# Altium PCB DP_Slave_PCB.PcbDoc
Units mm, origin at the board's own origin, x right, y up, seen from the top; angles counter-clockwise.
Board outline 96.72 x 85.42 mm, 2 copper layers (Top Layer, Bottom Layer); 86 components, 69 nets, 372 pads, 72 vias.
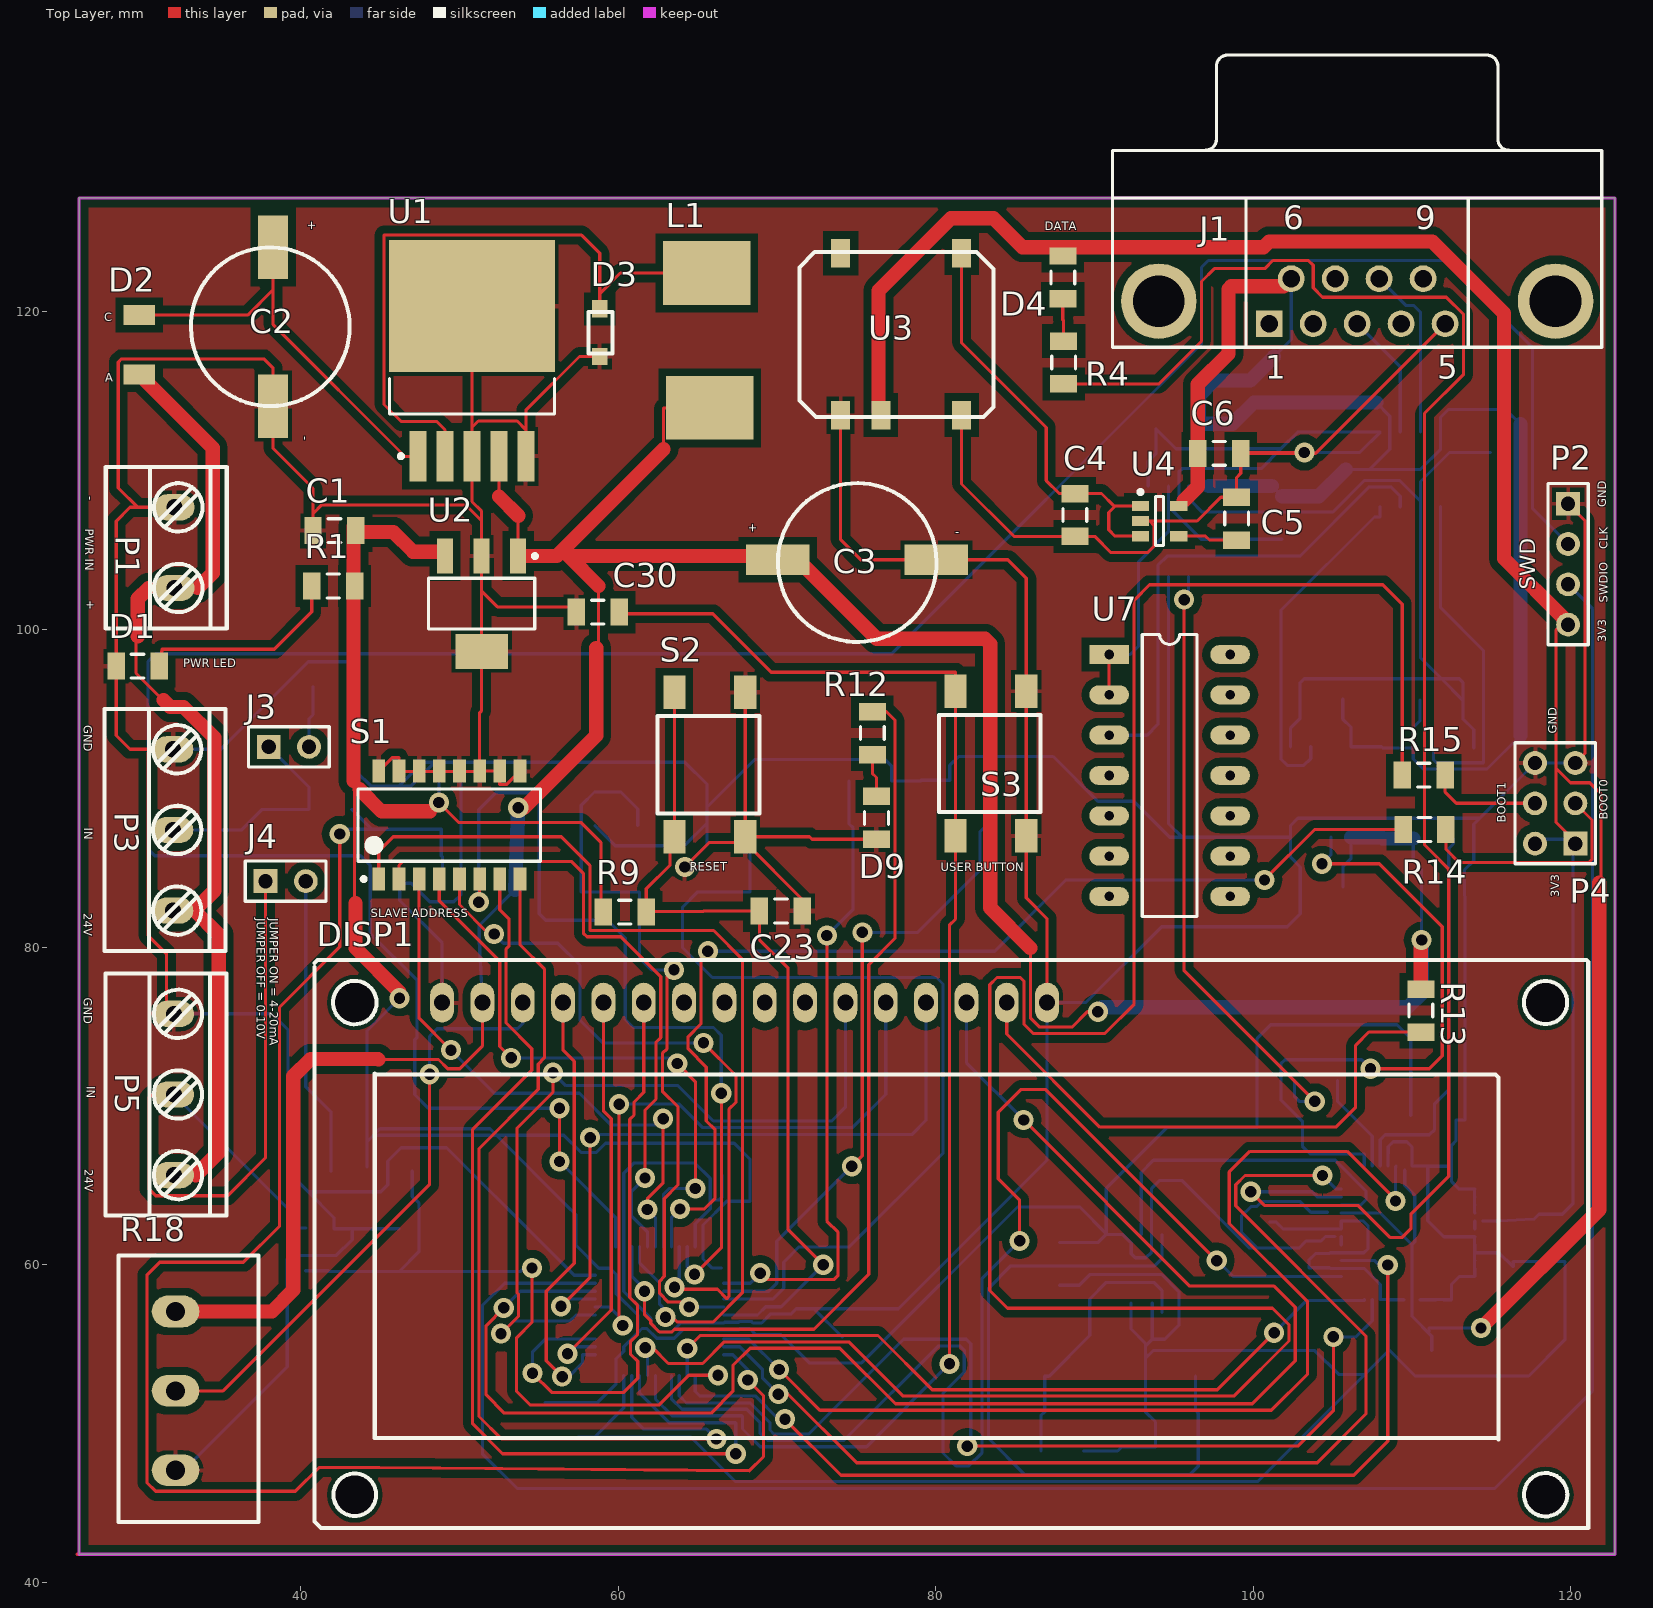
[diagram p0: Top Layer view]
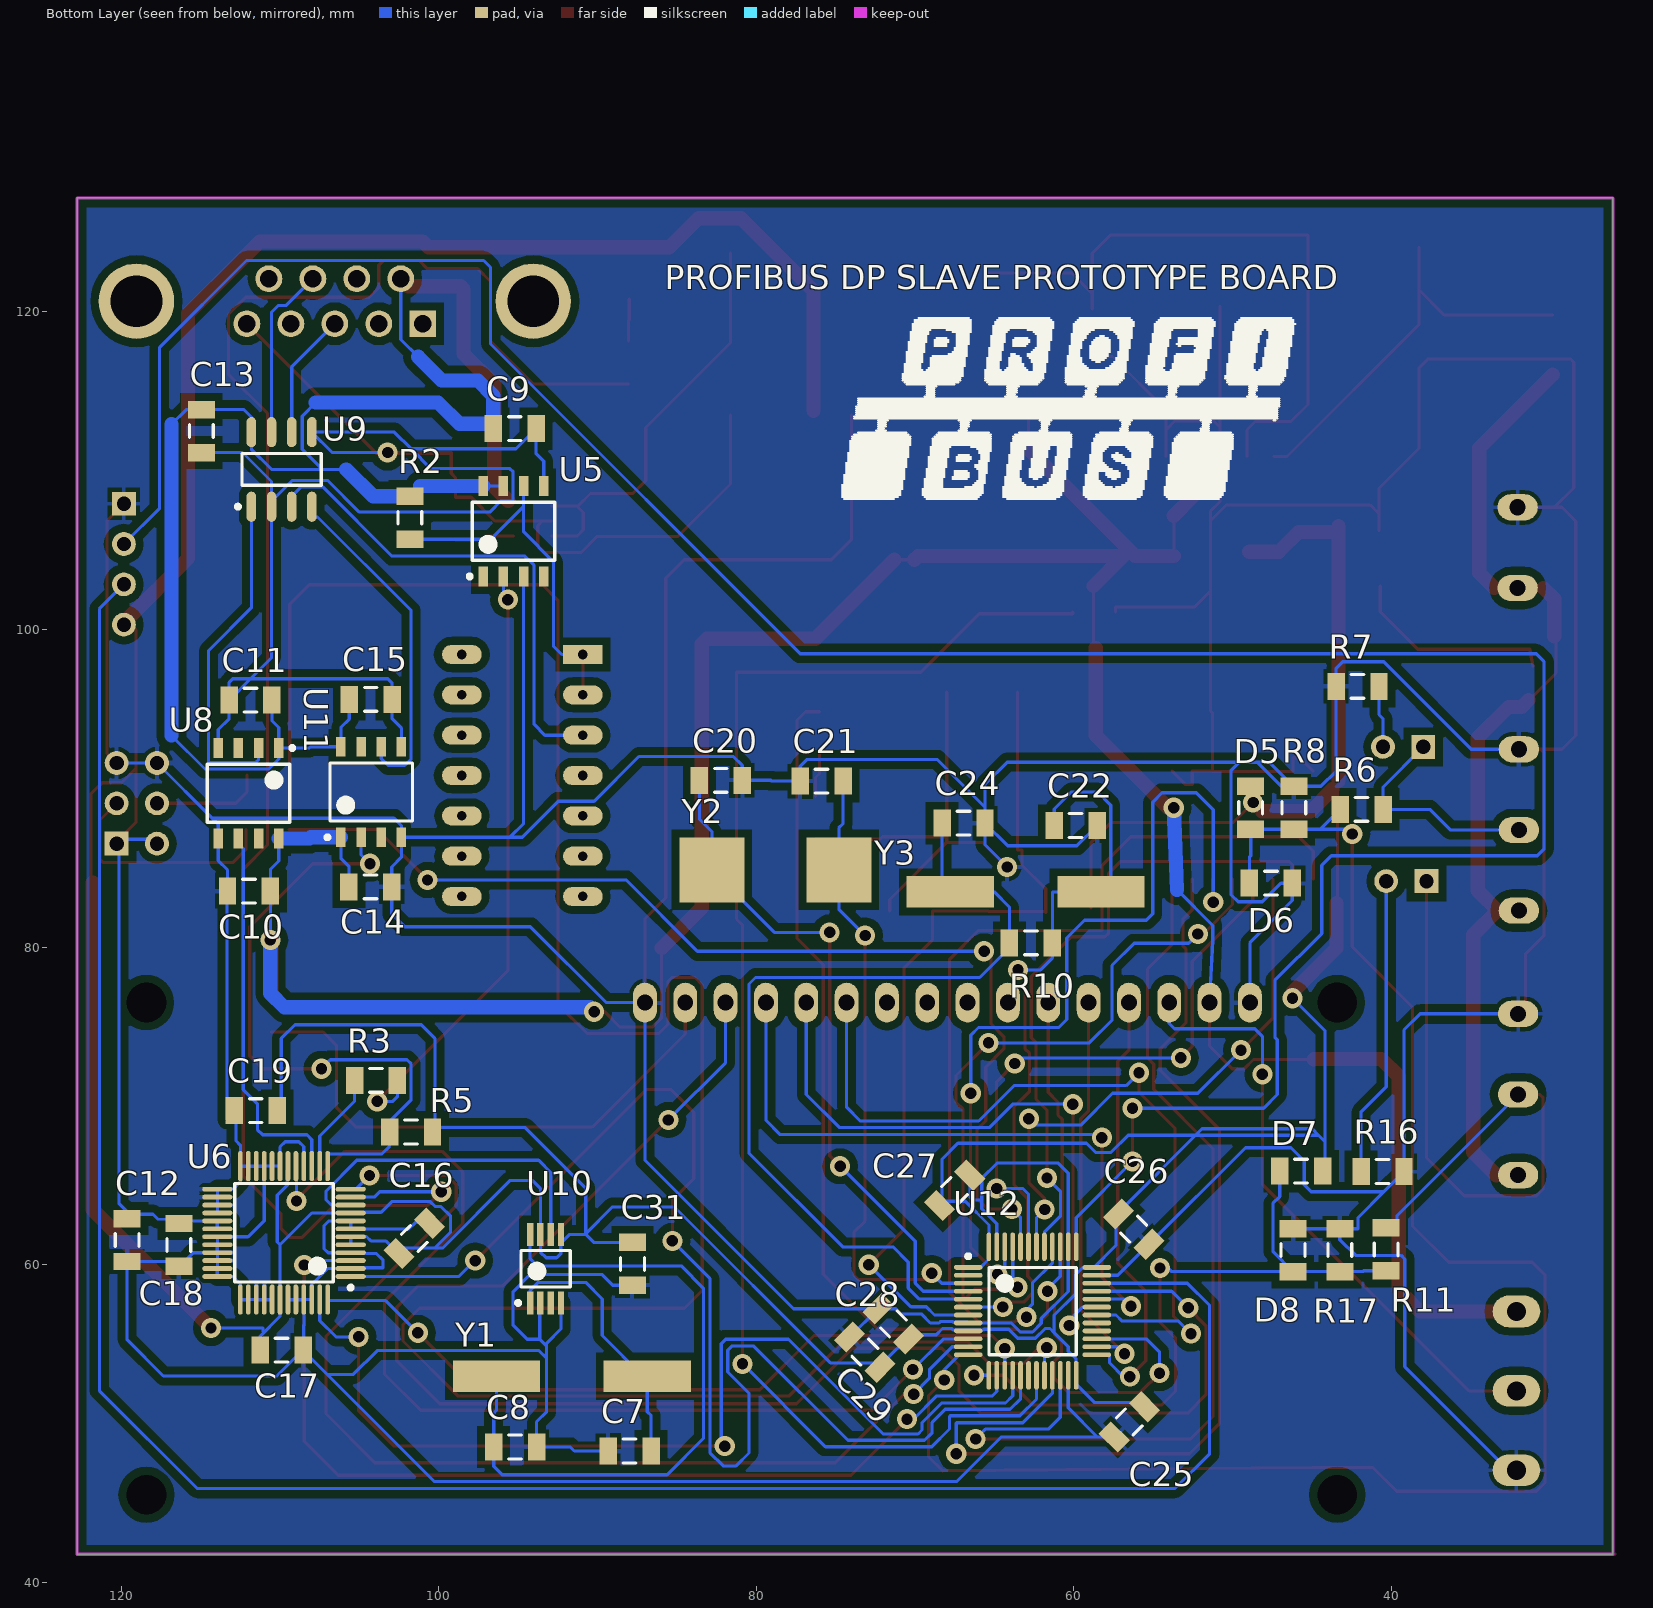
[diagram p1: Bottom Layer view, seen from below]

## Layer stack, top to bottom
Top Solder: solder mask 0.0102, Solder Resist, Dk 3.5
Top Layer: signal copper 0.0356
Dielectric1: dielectric 0.32, FR-4, Dk 4.8
Bottom Layer: signal copper 0.0356
Bottom Solder: solder mask 0.0102, Solder Resist, Dk 3.5

## Board outline
26.06,41.758 26.06,127.178 122.784,127.178 122.784,41.758

## Design rules (kind name [scope] priority, off if disabled: settings)
Clearance Clearance_poly_all [InPoly] p1: gap=0.5
Clearance Clearance_poly_poly [inPoly vs InPoly] p2: gap=0.9
Clearance [All] p3: gap=0.2
Clearance Clearance_1 [InComponent('U6')and IsPad] p4: gap=0.2
PolygonConnect [All] p1: connectstyle=Relief reliefconductorwidth=0.254 reliefentries=4 polygonreliefangle="90 Angle" airgapwidth=0.254
RoutingVias [All] p1: holewidth=0.711 width=1.27 viastyle="Through Hole" minholewidth=0.711 minwidth=1.27 maxholewidth=0.711 maxwidth=1.27
SolderMaskExpansion [All] p1: expansion=0.102
Width [IsTrack and (InNet('24V')or InNet('3V3') or InNet('5V')  or InNet('GND_ISO') or InNet('VCC_ISO'))] p1: maxlimit=1 minlimit=0.2 preferedwidth=1
Width Width_1 [All] p2: maxlimit=0.254 minlimit=0.2 preferedwidth=0.2
30 further rules are at their usual default settings.

## Components (designator, comment, footprint, x,y, rotation, side; value= is the part's Value field where it differs from the comment)
C1 "1uF" C1206 42.139,106.223 r0 top
C2 "100uF/35V" "SMD Elkó" 38.278,119.075 r270 top
C3 "330uF" "SMD Elkó" 75.057,104.394 r0 top
C4 "1uF" C1206 88.773,107.213 r90 top
C5 "10nF" C1206 98.958,106.985 r270 top
C6 "1uF" C1206 97.866,111.1 r180 top
C7 "22pF" C1206 87.986,48.26 r0 bottom
C8 "22pF" C1206 95.199,48.514 r180 bottom
C9 "100nF" C1206 95.225,112.649 r0 bottom
C10 "100nF" C1206 111.963,83.515 r0 bottom
C11 "100nF" C1206 111.862,95.555 r0 bottom
C12 "100nF" C1206 119.634,61.544 r90 bottom
C13 "100nF" C1206 114.96,112.497 r90 bottom
C14 "100nF" C1206 104.318,83.795 r0 bottom
C15 "100nF" C1206 104.292,95.606 r0 bottom
C16 "100nF" C1206 101.549,61.646 r315 bottom
C17 "100nF" C1206 109.906,54.61 r0 bottom
C18 "100nF" C1206 116.383,61.239 r90 bottom
C19 "100nF" C1206 111.531,69.698 r180 bottom
C20 "20pF" C1206 82.245,90.5 r0 bottom
C21 "20pF" C1206 75.895,90.449 r180 bottom
C22 "20pF" C1206 59.893,87.655 r0 bottom
C23 "100nF" C1206 70.256,82.271 r180 top
C24 "20pF" C1206 66.954,87.808 r0 bottom
C25 "100nF" C1206 56.515,50.089 r135 bottom
C26 "100nF" C1206 56.236,62.23 r45 bottom
C27 "100nF" C1206 67.513,64.668 r315 bottom
C28 "100nF" C1206 73.177,54.483 r225 bottom
C29 "1uF" C1206 71.374,56.261 r225 bottom
C30 "100nF" C1206 58.725,101.092 r0 top
C31 "100nF" C1206 87.808,60.046 r90 bottom
D1 "LED0" C1206 29.743,97.688 r180 top
D2 "Diode" "Dióda MiniMelf SOD80" 29.845,116.053 r90 top
D3 "D Schottky" "Schottky dióda" 58.852,118.694 r90 top
D4 "LED0" C1206 88.011,122.174 r270 top
D5 "Diode" C1206 48.87,88.773 r90 bottom
D6 "Diode" C1206 47.6,84.023 r0 bottom
D7 "Diode" C1206 45.695,65.888 r180 bottom
D8 "Diode" C1206 46.203,60.909 r270 bottom
D9 "LED" c1206 76.276,88.138 r270 top
DISP1 "LCD_1602A" LCD 48.92,76.505 r0 top
J1 "D Connector 9" DSUB1.385-2H9 106.553,130.175 r0 top
J3 "JUMP-2" HDR1X2 37.998,92.608 r0 top
J4 "JUMP-2" HDR1X2 37.795,84.15 r0 top
L1 "330mH" "SMD tekercs" 65.583,122.453 r0 top
P1 "Sorkapocs" SORKAPOCS-2 32.055,107.696 r0 top
P2 "Header 4" HDR1X4 119.837,107.925 r270 top
P3 "Header 3" SORKAPOCS-3 31.979,92.456 r0 top
P4 "Header 3X2" HDR2X3 120.294,86.512 r90 top
P5 "Header 3" SORKAPOCS-3 32.029,75.794 r0 top
R1 "330R" C1206 42.062,102.743 r180 top
R2 "" C1206 101.829,107.036 r90 bottom
R3 "1K" C1206 103.962,71.603 r180 bottom
R4 "330R" C1206 88.062,116.815 r90 top
R5 "4K7" C1206 101.752,68.351 r180 bottom
R6 "41.2k, 0.1%" C1206 41.885,88.671 r0 bottom
R7 "500R, 0.1%" C1206 42.139,96.418 r0 bottom
R8 "20k, 0.1%" C1206 46.152,88.773 r270 bottom
R9 "10k" C1206 60.427,82.194 r0 top
R10 "1M" c1206 62.713,80.264 r180 bottom
R11 "41.2k, 0.1%" C1206 40.335,60.96 r270 bottom
R12 "330R" c1206 76.022,93.472 r90 top
R13 "330R" C1206 110.566,75.997 r270 top
R14 "100K" C1206 110.795,87.401 r0 top
R15 "100K" C1206 110.744,90.83 r180 top
R16 "500R, 0.1%" C1206 40.564,65.862 r180 bottom
R17 "20k, 0.1%" C1206 43.256,60.909 r270 bottom
R18 "10k" Potméter 32.131,57.048 r270 top
S1 "SW DIP-8" "DIP switch" 49.378,87.681 r90 top
S2 "Nyomógomb" Switch 63.551,86.944 r90 top
S3 "Nyomógomb" Switch 81.255,87.02 r90 top
U1 "LM2575S-5.0" TS5B_N 50.8,116.916 r90 top
U2 "MCP1825S-3302E/DB" SOT-223-DB3_N 51.41,101.625 r270 top
U3 "R1SE-3.305/H2-R" "Isolated DC/DC converter" 74.016,123.698 r0 top
U4 "LP3985IM5-5.0/NOPB" MF05A_N 94.107,106.832 r0 top
U5 "HCPL-061N" HCPL-061N 83.871,123.292 r90 bottom
U6 "VPC3+S-QFP48" TSQFP50P900X900X160-48N 109.753,62.001 r0 bottom
U7 "NAND2" "NAND gate DIP14" 90.932,98.425 r0 top
U8 "HCPL-072X" SOIC127P600X330-8N 111.989,89.687 r270 bottom
U9 "SN75176BD" D008_L 109.906,110.084 r90 bottom
U10 "MAX31180" "MAX31180AUA+ -  Clock Generator" 71.831,107.036 r90 bottom
U11 "HCPL-072X" SOIC127P600X330-8N 104.267,89.764 r90 bottom
U12 "STM32F103C8T6" LQFP48_N 62.611,57.074 r180 bottom
Y1 "24MHz" "8 MHz SMD kristály" 103.124,50.47 r180 bottom
Y2 "XTAL" "32.768 MHz SMD kristály" 74.803,84.861 r0 bottom
Y3 "XTAL" "8 MHz SMD kristály" 74.549,80.975 r180 bottom

## Footprints (in the part's own frame and the unit in brackets; to place one, negate y for a bottom-side part, rotate by r counter-clockwise, add the part's x,y. Pads: shape width x height; smd on the part's side, far side on the other; paste and mask are expansions set on the pad)
"8 MHz SMD kristály" [mm]
  rect 5.5x2 smd: 1(6.75,2.5) 2(16.25,2.5)
"32.768 MHz SMD kristály" [mm]
  rect 4.1x4.1 smd: 1(0,0) 2(8,0)
C1206 [mm] "Chip Capacitor, Body 3.2x1.6mm, IPC High Density"
  rect 1.1x1.7 smd: 1(-1.35,0) 2(1.35,0)
  silkscreen extent -0.4,-0.75 0.4,0.75, body extent -1.7,-0.9 1.7,0.9, height 1.3
c1206 [mm] "Chip Capacitor, Body 3.2x1.6mm, IPC High Density"
  rect 1.1x1.7 smd: 1(-1.35,0) 2(1.35,0)
  silkscreen extent -0.4,-0.75 0.4,0.75, body extent -1.7,-0.9 1.7,0.9, height 1.3
D008_L [mm] "SOIC, 8-Leads, Body 4.9x3.9mm, Pitch 1.27mm, IPC High Density"
  oval 1.9x0.6 smd: 1(-2.35,1.905) 2(-2.35,0.635) 3(-2.35,-0.635) 4(-2.35,-1.905) 5(2.35,-1.905) 6(2.35,-0.635) 7(2.35,0.635) 8(2.35,1.905)
  silkscreen extent -2.47,-2.5 1,2.88, body extent -2,-2.5 2,2.5, height 1.75
"DIP switch" [mm] "TSOP, 16-Leads, Body 12,50x4,50mm, Pitch 1,27mm, IPC Medium Density"
  rect 1.45x0.8 smd: 1(-3.4,4.445) 2(-3.4,3.175) 3(-3.4,1.905) 4(-3.4,0.635) 5(-3.4,-0.635) 6(-3.4,-1.905) 7(-3.4,-3.175) 8(-3.4,-4.445) 9(3.4,-4.445) 10(3.4,-3.175) 11(3.4,-1.905) 12(3.4,-0.635) 13(3.4,0.635) 14(3.4,1.905) 15(3.4,3.175) 16(3.4,4.445)
  silkscreen extent -3.52,-5.75 2.27,5.75, body extent -3.69,-6.25 3.7,6.25, height 1.5
"Dióda MiniMelf SOD80" [mm]
  rect 1.25x2 smd: 1(0,0) 2(3.75,0)
DSUB1.385-2H9 [mm] "Connector; D Subminiature; 9 Position; Right Angle; Pitch 1.385 mm"
  rect 1.69x1.69 hole 1.09: 1(-5.54,-10.92)
  round 1.69 hole 1.09: 2(-2.77,-10.92) 3(0,-10.92) 4(2.77,-10.92) 5(5.54,-10.92) 6(-4.155,-8.08) 7(-1.385,-8.08) 8(1.385,-8.08) 9(4.155,-8.08)
  round 4.76 hole 3.26: 10(-12.495,-9.5) 11(12.495,-9.5)
  silkscreen extent -15.4,-12.4 15.4,6
HCPL-061N [mm] "SOP, 8-Leads, Body 5,08x3,94mm, Pitch 1,27mm, IPC Medium Density"
  rect 1.25x0.6 smd: 1(-19.95,13.335) 2(-19.95,12.065) 3(-19.95,10.795) 4(-19.95,9.525) 5(-14.25,9.525) 6(-14.25,10.795) 7(-14.25,12.065) 8(-14.25,13.335)
  silkscreen extent -20.07,8.83 -15.28,14.31, body extent -20.1,8.83 -14.1,14.03, height 3.3
HDR1X2 [mm]
  rect 1.5x1.5 hole 0.9: 1(0,0)
  round 1.5 hole 0.9: 2(2.54,0)
  silkscreen extent -1.27,-1.27 3.81,1.27
HDR1X4 [mm] "Connector; Header; 4 Position"
  rect 1.5x1.5 hole 0.9: 1(0,0)
  round 1.5 hole 0.9: 2(2.54,0) 3(5.08,0) 4(7.62,0)
  silkscreen extent -1.27,-1.27 8.89,1.27
HDR2X3 [mm] "Connector; Header; 3x2 Position"
  rect 1.5x1.5 hole 0.9: 1(0,0)
  round 1.5 hole 0.9: 2(0,2.54) 3(2.54,0) 4(2.54,2.54) 5(5.08,0) 6(5.08,2.54)
  silkscreen extent -1.27,-1.27 6.35,3.81
"Isolated DC/DC converter" [mm] "R1SE-3.305/H2-R"
  rect 1.2x1.8 smd: 1(0,-10.2) 2(2.54,-10.2) 4(7.62,-10.2) 5(7.62,0) 8(0,0)
  silkscreen extent -2.59,-10.31 9.63,0.08
LCD [mm]
  oval 1.5x2.5 hole 1: 1(0,0) 2(2.54,0) 3(5.08,0) 4(7.62,0) 5(10.16,0) 6(12.7,0) 7(15.24,0) 8(17.78,0) 9(20.32,0) 10(22.86,0) 11(25.4,0) 12(27.94,0) 13(30.48,0) 14(33.02,0) 15(35.56,0) 16(38.1,0)
  round 0 hole 2.5: 19(-5.5,-31) 19(-5.5,0) 19(69.5,-31) 19(69.5,0)
  silkscreen extent -8.03,-33.1 72.19,2.67
LQFP48_N [mm] "Thin QFP, 48-Leads, Body 7x7mm, Pitch 0.5mm, IPC Medium Density"
  oval 1.8x0.3 smd: 1(-4.05,2.75) 2(-4.05,2.25) 3(-4.05,1.75) 4(-4.05,1.25) 5(-4.05,0.75) 6(-4.05,0.25) 7(-4.05,-0.25) 8(-4.05,-0.75) 9(-4.05,-1.25) 10(-4.05,-1.75) 11(-4.05,-2.25) 12(-4.05,-2.75) 25(4.05,-2.75) 26(4.05,-2.25) 27(4.05,-1.75) 28(4.05,-1.25) 29(4.05,-0.75) 30(4.05,-0.25) 31(4.05,0.25) 32(4.05,0.75) 33(4.05,1.25) 34(4.05,1.75) 35(4.05,2.25) 36(4.05,2.75)
  oval 0.3x1.8 smd: 13(-2.75,-4.05) 14(-2.25,-4.05) 15(-1.75,-4.05) 16(-1.25,-4.05) 17(-0.75,-4.05) 18(-0.25,-4.05) 19(0.25,-4.05) 20(0.75,-4.05) 21(1.25,-4.05) 22(1.75,-4.05) 23(2.25,-4.05) 24(2.75,-4.05) 37(2.75,4.05) 38(2.25,4.05) 39(1.75,4.05) 40(1.25,4.05) 41(0.75,4.05) 42(0.25,4.05) 43(-0.25,4.05) 44(-0.75,4.05) 45(-1.25,4.05) 46(-1.75,4.05) 47(-2.25,4.05) 48(-2.75,4.05)
  silkscreen extent -4.18,-2.75 2.75,3.57, body extent -3.5,-3.5 3.5,3.5, height 1.6
"MAX31180AUA+ -  Clock Generator" [mm] "uSOP"
  rect 1.45x0.4 smd: 1(-49.45,22.425) 2(-49.45,21.775) 3(-49.45,21.125) 4(-49.45,20.475) 5(-45.15,20.475) 6(-45.15,21.125) 7(-45.15,21.775) 8(-45.15,22.425)
  silkscreen extent -49.57,19.9 -46.15,23.3, body extent -49.75,19.9 -44.85,23, height 1.1
MF05A_N [mm] "SOT23, 5-Leads, Body 2.9x1.6mm, Pitch 0.95mm, Lead Span 2.8mm, IPC Medium Density"
  rect 1.1x0.65 smd: 1(-1.2,0.95) 2(-1.2,0) 3(-1.2,-0.95) 4(1.2,-0.95) 5(1.2,0.95)
  silkscreen extent -1.32,-1.55 0.25,1.95, body extent -0.9,-1.55 0.9,1.55, height 1.19
"NAND gate DIP14" [mm]
  rect 2.5x1.2 hole 0.6: 1(0,0)
  oval 2.5x1.2 hole 0.6: 2(0,-2.54) 3(0,-5.08) 4(0,-7.62) 5(0,-10.16) 6(0,-12.7) 7(0,-15.24) 8(7.62,-15.24) 9(7.62,-12.7) 10(7.62,-10.16) 11(7.62,-7.62) 12(7.62,-5.08) 13(7.62,-2.54) 14(7.62,0)
  silkscreen extent 2.08,-16.51 5.54,1.27
Potméter [mm]
  oval 2x3 hole 1.2: 1(0,0) 2(10,0) 3(5,0)
  silkscreen extent -3.53,-3.61 13.26,5.23
"Schottky dióda" [mm] "1N5819HW"
  rect 1.1x1 smd: 1(-1.5,0) 2(1.5,0)
  silkscreen extent -1.3,-0.8 1.3,0.7
"SMD Elkó" [mm]
  rect 4x1.9 smd: 1(-5,0) 2(5,0)
  silkscreen extent -4.99,-5.18 5.01,4.82
"SMD tekercs" [mm] "MSS1278T-334KLD"
  rect 5.5x4 smd: 1(0,0) 2(0.2,-8.5)
SOIC127P600X330-8N [mm] "SOIC, 8-Leads, Body 5,08x3,94mm, Pitch 1,27mm, IPC Medium Density"
  rect 1.25x0.6 smd: 1(-2.85,1.905) 2(-2.85,0.635) 3(-2.85,-0.635) 4(-2.85,-1.905) 5(2.85,-1.905) 6(2.85,-0.635) 7(2.85,0.635) 8(2.85,1.905)
  silkscreen extent -2.97,-2.6 1.82,2.88, body extent -3,-2.6 3,2.6, height 3.3
SORKAPOCS-2 [mil]
  oval 100x65 hole 40: 1(0,0) 2(0,-200)
  silkscreen extent -170,-300 130,100
SORKAPOCS-3 [mil]
  oval 100x65 hole 40: 1(0,0) 2(0,-200) 3(0,-400)
  silkscreen extent -170,-500 130,100
SOT-223-DB3_N [mm] "SOT223, 4-Leads, Body 6.5x3.5mm, Pitch 2.3mm, Lead Span 7mm, IPC Medium Density"
  rect 2.2x1 smd: 1(-3,2.3) 2(-3,0) 3(-3,-2.3)
  rect 2.2x3.3 smd: 4(3,0)
  silkscreen extent -3.12,-3.35 1.6,3.48, body extent -1.85,-3.35 1.85,3.35, height 1.8
Switch [mm] "FSM2JSMLS -  Tactile Switch"
  rect 2.1x1.4 smd: 1(9.1,-4.46) 2(0,-4.46) 3(9.1,0) 4(0,0)
  silkscreen extent 1.47,-5.35 7.6,1.05
TS5B_N [mm] "D2-PAK, 6-Leads, Body 8.6x10.2mm, Pitch 1.7mm, Lead Span 14.1mm, IPC Medium Density"
  rect 3.2x1.05 smd: 1(-6,3.4) 2(-6,1.7) 3(-6,0) 4(-6,-1.7) 5(-6,-3.4)
  rect 8.3x10.45 smd: 6(3.45,0)
  silkscreen extent -6.12,-5.2 -1.1,5.2, body extent -3.35,-5.2 6.05,5.2, height 4.65
TSQFP50P900X900X160-48N [mm] "TSQFP, 48-Leads, Body 7,00x7,00mm, Pitch 0,50mm, IPC Medium Density"
  oval 1.9x0.3 smd: 1(-4.2,2.75) 2(-4.2,2.25) 3(-4.2,1.75) 4(-4.2,1.25) 5(-4.2,0.75) 6(-4.2,0.25) 7(-4.2,-0.25) 8(-4.2,-0.75) 9(-4.2,-1.25) 10(-4.2,-1.75) 11(-4.2,-2.25) 12(-4.2,-2.75) 25(4.2,-2.75) 26(4.2,-2.25) 27(4.2,-1.75) 28(4.2,-1.25) 29(4.2,-0.75) 30(4.2,-0.25) 31(4.2,0.25) 32(4.2,0.75) 33(4.2,1.25) 34(4.2,1.75) 35(4.2,2.25) 36(4.2,2.75)
  oval 0.3x1.9 smd: 13(-2.75,-4.2) 14(-2.25,-4.2) 15(-1.75,-4.2) 16(-1.25,-4.2) 17(-0.75,-4.2) 18(-0.25,-4.2) 19(0.25,-4.2) 20(0.75,-4.2) 21(1.25,-4.2) 22(1.75,-4.2) 23(2.25,-4.2) 24(2.75,-4.2) 37(2.75,4.2) 38(2.25,4.2) 39(1.75,4.2) 40(1.25,4.2) 41(0.75,4.2) 42(0.25,4.2) 43(-0.25,4.2) 44(-0.75,4.2) 45(-1.25,4.2) 46(-1.75,4.2) 47(-2.25,4.2) 48(-2.75,4.2)
  silkscreen extent -4.32,-3.1 3.1,3.57, body extent -4.5,-4.5 4.5,4.5, height 1.6

## Part data
C1 C12 C23: library part "Cap Semi", "Szûrõkondi"
C2: library part "Cap Pol3", "SMD elkó/40V"
C3: library part "Cap Pol3", "LDO kimeneti polárkondi"
C4 C5 C6 C16 C17 C18 C19 C31: library part "Cap Semi", "Capacitor (Semiconductor SIM Model)"
C7 C8 C20 C21 C22 C24 C25 C26 C27 C28 C29 C30: library part "Cap Semi", "SMD kerámia"
C9 C10 C11 C13 C14 C15: library part "Cap Semi", "SMD KERÁMIA"
D1 D4: "Typical INFRARED GaAs LED"
D3: "Schottky Diode"
D5 D6 D7 D8: "Default Diode"
D9: library part LED2, "Piros felhasználói LED"
J1: "Receptacle Assembly, 9 Position, Right Angle"
L1: library part Inductor, "Inductor"
P1: library part "Header 2", "12V input"
P2: "Header, 4-Pin"
P3 P5: "Header, 3-Pin"
P4: "Header, 3-Pin, Dual row"
R1 R4 R5 R6 R7 R8 R9 R10 R11 R12 R13 R14 R15 R16 R17: library part Res3, "SMD ellenállás"
R2: library part Res3, "Resistor"
R3: library part Res3, "SMD ELLENÁLLÁS"
R18: library part RPot, "Potentiometer"
S1: "DIP Switch, 8 Position, SPST"
S2 S3: library part "Tactile switch", "4 lábas, SMD, tactile"
U1: "SIMPLE SWITCHER® 1A Step-Down Voltage Regulator, 5-pin TO-263"
U2: "500 mA, Low Voltage, Low Quiescent Current LDO Regulator, 3-Pin SOT-223, Extended Temperature"
U3: "Isolated DC/DC converter 3.3-5V"
U4: "Micropower, 150mA Low-Noise Ultra Low-Dropout CMOS Voltage Regulator, 5-pin SOT-23, Pb-Free"
U6: library part VPC3+S(1), "pROFIBUS CONTROLLER"
U7: "2-Input NAND"
U8 U11: "Optocoupler"
U9: "Differential Bus Transceiver"
U12: "STM32 ARM-based 32-bit MCU with 64 Kbytes Flash, 48-pin LQFP, Industrial Temperature"
Y1: library part XTAL, "SMD kristály"
Y2: "32.768 KHz kristály"
Y3: "8 MHz kristály"

## Via types
v1: diameter 1.27, hole 0.711, Top Layer to Bottom Layer, 72 vias

## Nets (pads, with @x,y where several pads share a name; then routed paths per layer and width w, separated by ;. In a path a pad name is that pad's centre, name@x,y a point inside that pad or via, vN(x,y) a via of type N, cw(c..) or ccw(c..) an arc to the next point about the centre after c; other vN are vias at no path point)
1: S1.1 U12.40 | length 63
  Top Layer w0.2: S1.1 44.933,86.03 45.847,86.944 56.423,86.944 58.227,85.141 58.227,81.044 66.019,81.044 67.832,79.231 67.832,58.231 65.989,56.388 63.729,56.388 63.017,57.099 62.992,57.074 v1(62.992,56.693)
  Bottom Layer w0.2: U12.40 61.361,60.096 62.616,58.841 62.616,57.501 62.992,57.125 v1(62.992,56.693)
2: S1.2 U12.41 | length 40.8
  Top Layer w0.2: S1.2 46.203,85.141 46.457,85.395 57.063,85.395 57.817,84.641 57.817,80.874 58.047,80.644 60.173,80.644 62.687,78.13 62.687,74.298 62.394,74.004 62.394,70.42 61.697,69.723 v1(61.697,65.456)
  Bottom Layer w0.2: v1(61.697,65.456) 60.858,64.618 60.858,63.043 61.861,62.04 U12.41
3: S1.3 U12.42 | length 35.8
  Top Layer w0.2: S1.3 47.473,75.514 v1(49.479,73.508) ; v1(61.849,63.475) 61.849,64.152 62.84,65.143 v1(62.84,69.19)
  Bottom Layer w0.2: v1(49.479,73.508) 52.197,70.789 57.573,70.789 59.579,68.783 62.433,68.783 v1(62.84,69.19) ; v1(61.849,63.475) 62.361,62.963 U12.42
3V3: C1.2 C12.2 C16.2 C17.2 C18.2 C19.2 C25.2 C26.2 C27.2 C28.2 C29.2 C31.2 D4.1 D5.2 D7.2 P2.4 P4.1 P4.2 R1.1 R5.2 R9.1 U2.3 U3.2 U6.5 U6.6 U6.9 U6.18 U6.29 U6.30 U6.42 U10.5 U10.7 U12.1 U12.9 U12.24 U12.36 U12.48 | length 424.7
  Top Layer w0.2: C1.2@43.336,106.502 C1.2@43.692,106.147 ; 43.409,90.399 43.409,82.804 43.459,82.753 ; 48.158,88.544 v1(48.717,89.103) 49.982,87.838 57.679,87.838 58.924,86.592 R9.1@58.924,82.474 ; P2.4@119.685,100.584 119.075,99.974 119.075,91.262 ; P4.1@120.142,86.792 119.075,87.859 119.075,91.262 ; 122.123,83.947 121.92,84.15 121.92,89.637 121.209,90.348 119.99,90.348 119.075,91.262
  Top Layer w0.9: 43.336,90.471 C1.2@43.336,106.502 ; 43.459,82.753 43.459,79.934 46.239,77.154 v1(46.239,76.773) ; C1.2@43.692,106.147 45.847,106.147 47.089,104.905 U2.3@48.957,104.905 ; 43.723,89.932 45.11,88.544 48.158,88.544 ; U3.2@76.403,113.777 76.403,121.336 80.975,125.908 83.642,125.908 85.471,124.079 100.657,124.079 101.013,124.435 111.281,124.435 115.799,119.917 115.799,104.47 P2.4@119.685,100.584 ; v1(114.351,56.007) 121.793,63.449 121.793,84.049
  Bottom Layer w0.2: D7.2@44.192,66.167 44.192,67.742 ; v1(46.239,76.773) 44.192,74.726 44.192,67.742 ; v1(48.717,89.103) D5.2@48.717,90.402 ; C25.2@55.408,51.323 58.733,51.323 59.868,52.458 59.868,54.051 60.364,54.548 60.364,54.832 61.265,55.732 ; U12.1@66.509,59.792 65.915,59.792 65.354,60.352 65.354,62.495 66.852,63.993 68.315,63.993 68.315,66.635 67.31,67.64 59.209,67.64 58.629,67.061 57.674,67.061 56.586,68.148 52.344,68.148 ; C31.2 90.25,61.396 90.754,61.9 90.754,61.954 ; 100.269,61.047 99.263,62.052 99.263,63.043 99.878,63.657 100.235,63.657 100.544,63.967 102.975,63.967 103.64,63.301 U6.9@104.667,63.301 ; U6.6@105.143,61.773 104.561,61.773 104.282,61.493 103.353,61.493 102.906,61.047 99.761,61.047 95.504,65.303 94.107,65.303 93.606,64.803 U10.7 93.606,60.789 93.243,60.427 92.583,60.427 92.329,60.681 92.329,61.341 91.784,61.886 90.823,61.886 90.754,61.954 ; U6.5 U6.6 ; U6.9 107.995,63.251 110.003,61.243 ; U6.18@109.525,65.964 109.553,65.935 109.553,64.995 110.185,64.364 110.185,61.425 110.003,61.243 ; C19.2@109.927,69.393 109.927,74.244 109.064,75.108 101.114,75.108 100.25,74.244 100.25,68.631 94.564,68.631 90.754,64.821 90.754,61.954 ; 111.078,55.804 111.078,56.007 v1(114.351,56.007) ; C17.2 111.256,55.499 110.003,56.751 U6.42 110.003,61.243 ; U6.30 U6.29 ; U6.29@114.452,62.742 115.453,62.742 117.704,62.869 118.008,63.174 119.482,63.174 120.142,63.834 120.142,86.792 P4.2@117.602,86.792 ; 44.192,67.742 44.599,68.148 ; 44.599,68.148 45.005,68.555 51.937,68.555 52.344,68.148 ; 44.599,68.148 52.344,68.148 ; 52.344,68.148 57.028,63.464 57.038,63.464 57.353,63.149 57.353,61.214 58.793,59.774 59.497,59.774 59.893,59.378 59.893,58.166 61.265,56.795 61.265,55.732 ; 61.265,55.732 61.509,55.977 61.82,55.977 62.439,55.358 63.545,55.358 64.111,55.924 65.675,55.924 65.725,55.874 67.597,55.874 67.697,55.974 68.279,55.974 68.667,55.586 70.267,55.586 70.267,55.575 72.034,53.808 75.342,53.808 85.161,63.627 89.082,63.627 90.754,61.954
4: S1.4 U12.43 | length 37.6
  Top Layer w0.2: S1.4 48.743,82.906 52.55,79.098 52.55,73.738 v1(53.269,73.02) ; v1(63.729,72.669) 64.872,71.526 v1(64.872,64.795)
  Bottom Layer w0.2: v1(53.269,73.02) 63.378,73.02 v1(63.729,72.669) ; U12.43 62.861,64.436 63.22,64.795 v1(64.872,64.795)
5: S1.5 U12.45 | length 46.4
  Top Layer w0.2: S1.5 50.013,82.677 51.867,80.823 v1(52.197,80.823) ; v1(63.551,58.572) 63.673,58.45 66.264,58.45 66.853,57.861 66.98,57.988 66.98,69.774 67.432,70.226 67.432,71.912 v1(65.38,73.965)
  Bottom Layer w0.2: v1(52.197,80.823) 52.781,80.239 56.21,80.239 57.607,78.842 57.607,75.387 59.03,73.965 v1(65.38,73.965) ; v1(63.551,58.572) 63.779,58.572 63.861,58.491 U12.45
5V: C3.1 C10.1 C14.2 DISP1.2 L1.2 R13.1 R18.1 U1.4 U2.1 U8.8 U11.1 | length 194.1
  Top Layer w0.2: 44.912,72.919 48.697,72.919 49.276,72.339 50.038,72.339 51.46,73.762 DISP1.2 ; 52.5,108.372 U1.4 ; U2.1@53.71,104.623 U2.1 53.71,107.163 ; 56.134,104.623 56.896,104.623 ; 58.623,98.831 58.776,98.984 58.776,102.743 ; 62.865,111.354 62.865,113.953 L1.2 ; C3.1 C3.1@71.323,104.394 ; 85.97,79.942 85.97,75.548 86.563,74.955 88.595,74.955 89.561,75.921 v1(90.221,75.921) ; v1@110.566,80.442 v1(110.613,80.442)
  Top Layer w0.9: R18.1 38.202,57.048 39.548,58.395 39.548,71.857 40.64,72.949 44.882,72.949 44.912,72.919 ; 52.5,108.372 53.71,107.163 ; U2.1@53.71,104.623 56.134,104.623 62.865,111.354 ; v1(53.721,88.773) 54.077,88.773 58.623,93.32 58.623,98.831 ; 58.776,102.743 56.896,104.623 69.828,104.623 C3.1 ; C3.1@71.323,104.394 76.302,99.416 83.109,99.416 83.439,99.085 83.439,82.474 85.97,79.942 ; R13.1 v1@110.566,80.442
  Bottom Layer w0.2: DISP1.2 51.262,80.437 51.262,81.356 53.507,83.601 ; v1(90.221,75.921) v1@90.5,76.2 ; C14.2 105.668,85.09 106.172,85.594 U11.1 ; 108.077,86.914 108.153,86.837 ; U8.8 110.084,85.416 110.613,84.887 C10.1 v1(110.613,80.442)
  Bottom Layer w0.9: 53.507,83.601 v1(53.721,88.773) ; v1@90.5,76.2 109.728,76.2 110.613,77.085 v1(110.613,80.442) ; U11.1 108.077,86.914 ; 108.153,86.837 U8.8
6: S1.6 U12.46 | length 54.2
  Top Layer w0.2: v1(51.232,82.829) 51.283,82.88 S1.6 ; v1(64.821,59.385) 66.523,61.087 66.523,70.764 v1(66.497,70.79)
  Bottom Layer w0.2: v1(51.232,82.829) 51.232,88.646 52.299,89.713 54.458,89.713 55.042,89.129 55.042,82.093 55.448,81.686 59.334,81.686 60.452,80.569 60.452,75.438 60.96,74.93 66.015,74.93 66.497,74.447 v1(66.497,70.79) ; U12.46 64.361,59.845 v1(64.821,59.385)
7: S1.7 U12.21 | length 64.1
  Top Layer w0.2: S1.7 52.553,82.342 53.138,81.757 53.138,80.074 52.95,79.887 52.95,75.213 54.57,73.593 54.57,72.241 50.843,68.513 50.843,49.97 52.726,48.087 v1(67.412,48.087)
  Bottom Layer w0.2: U12.21 61.361,51.9 63.223,50.038 67.386,50.038 67.412,50.012 v1(67.412,48.087)
8: S1.8 U12.22 | length 60.3
  Top Layer w0.2: S1.8 53.823,80.162 55.361,78.624 55.361,73.02 54.97,72.63 54.97,71.034 51.243,67.307 51.243,50.433 52.654,49.022 v1(66.192,49.022)
  Bottom Layer w0.2: U12.22 60.861,50.391 61.614,49.638 65.576,49.638 v1(66.192,49.022)
24V: D2.1 P1.2 P3.3 P5.3 | length 63.2
  Top Layer w0.2: 29.743,99.568 29.642,99.466 29.642,97.257 31.344,95.555 31.369,95.555 ; 30.429,102.616 P1.2 33.528,102.616 ; P3.3 33.325,82.296 ; P5.3 33.401,65.634
  Top Layer w0.9: 29.743,99.568 29.743,101.93 30.429,102.616 ; D2.1 34.468,111.43 34.468,103.556 33.528,102.616 ; 31.369,95.555 31.801,95.123 32.639,95.123 34.569,93.193 34.569,83.541 33.325,82.296 34.849,80.772 34.849,67.081 33.401,65.634
A: J1.3 U9.6 | length 7.9
  Bottom Layer w0.2: J1.3 109.271,116.537 U9.6
ADC1: D5.1 D6.2 R6.2 R8.2 U12.12 | length 108.5
  Top Layer w0.2: v1(42.469,87.122) 42.469,80.01 38.684,76.225 38.684,62.433 36.398,60.147 31.14,60.147 30.328,59.334 30.328,46.279 30.886,45.72 39.675,45.72 41.173,47.219 44.958,47.219 68.275,47.015 69.164,47.904 69.164,51.74 v1(68.174,52.73)
  Bottom Layer w0.2: v1(42.469,87.122) 42.77,87.423 44.483,87.423 ; R6.2 44.483,87.423 ; D6.2 48.95,85.674 48.87,85.754 D5.1 R8.2 44.483,87.423 ; U12.12 67.234,54.324 68.174,53.384 v1(68.174,52.73)
ADC2: D7.1 D8.2 R11.2 R17.2 U12.13 | length 44.3
  Top Layer w0.2: v1(54.582,59.792) 54.582,56.36 53.613,55.391 53.613,52.007 54.458,51.162 62.593,51.162 64.466,53.035 v1(66.294,53.035)
  Bottom Layer w0.2: R11.2 41.758,59.61 41.808,59.559 R17.2 D8.2 ; D7.1 47.045,64.284 47.473,63.856 47.473,60.829 D8.2 ; v1(54.582,59.792) 54.08,59.792 53.848,59.559 D8.2 ; U12.13 65.361,53.035 v1(66.294,53.035)
B: J1.8 U9.7 | length 11
  Bottom Layer w0.2: J1.8 109.637,120.396 110.134,120.396 110.541,119.99 U9.7
BOOT0: R14.1 U12.44 | length 68.8
  Top Layer w0.2: v1(63.906,63.5) 65.43,63.5 66.116,64.186 66.116,68.489 65.562,69.043 65.562,72.436 64.414,73.584 64.414,74.346 65.227,75.159 65.227,79.299 v1(65.659,79.731) ; v1(100.711,84.226) 103.886,87.401 R14.1
  Bottom Layer w0.2: U12.44 63.361,62.955 v1(63.906,63.5) ; v1(65.659,79.731) 83.718,79.731 88.214,84.226 v1(100.711,84.226)
BOOT1: R15.2 U12.20 | length 153.3
  Top Layer w0.2: v1(61.716,54.759) 62.183,54.759 63.17,53.772 65.329,53.772 66.689,55.132 74.535,55.132 77.953,51.714 98.781,51.714 102.258,55.191 102.258,56.213 101.219,57.252 84.531,57.252 83.414,58.369 83.414,77.622 83.871,78.08 85.344,78.08 85.57,77.853 85.57,75.141 86.157,74.555 90.658,74.555 92.507,76.403 92.507,101.854 93.472,102.819 108.175,102.819 109.394,101.6 R15.2
  Bottom Layer w0.2: v1(61.716,54.759) 61.861,54.614 U12.20
CLOCK: U6.10 U10.6 | length 21.4
  Bottom Layer w0.2: U10.6 92.956,65.804 93.721,66.569 105.173,66.569 107.112,64.629 107.112,64.084 106.779,63.751 U6.10
CS: U6.3 U12.14 | length 61.9
  Top Layer w0.2: v1(70.51,50.267) 74.041,46.736 106.35,46.736 108.483,48.87 v1(108.483,59.969)
  Bottom Layer w0.2: U12.14 64.861,52.004 65.132,51.733 68.637,51.733 70.104,50.267 v1(70.51,50.267) ; U6.3 107.668,60.251 107.95,59.969 v1(108.483,59.969)
D4: DISP1.11 U12.30 | length 50.9
  Top Layer w0.2: v1(52.629,55.651) 53.742,56.764 53.742,58.115 53.645,58.212 53.645,68.605 55.905,70.866 v1(55.905,72.085)
  Bottom Layer w0.2: v1(52.629,55.651) 53.416,56.439 56.968,56.439 57.353,56.824 U12.30 ; v1(55.905,72.085) 56.718,71.272 63.779,71.272 66.01,69.042 73.462,69.042 74.32,69.901 DISP1.11
D5: DISP1.12 U12.31 | length 40.5
  Top Layer w0.2: v1(60.071,70.104) 60.071,56.388 v1(60.3,56.159)
  Bottom Layer w0.2: U12.31 59.469,57.324 60.3,56.494 v1(60.3,56.159) ; v1(60.071,70.104) 60.092,70.125 63.827,70.125 65.31,68.642 74.789,68.642 76.86,70.714 DISP1.12
D6: DISP1.13 U12.32 | length 42.8
  Top Layer w0.2: v1(56.413,57.379) 58.217,59.182 58.242,59.157 v1(58.242,67.996)
  Bottom Layer w0.2: v1(56.413,57.379) 56.859,57.824 U12.32 ; v1(58.242,67.996) 58.615,67.996 58.807,68.188 78.5,68.188 79.4,69.088 DISP1.13
D7: DISP1.14 U12.33 | length 103.1
  Top Layer w0.2: v1(52.807,57.277) 51.689,56.159 51.689,51.791 52.832,50.648 65.862,50.648 67.234,52.019 67.234,53.645 68.321,54.732 73.975,54.732 77.476,51.232 99.949,51.232 102.658,53.94 102.658,57.312 101.321,58.649 96.012,58.649 v1(85.547,69.113)
  Bottom Layer w0.2: v1(52.807,57.277) 53.853,58.324 U12.33 ; DISP1.14 81.94,72.72 v1(85.547,69.113)
EN: DISP1.6 U12.27 | length 37.7
  Top Layer w0.2: v1(54.61,53.162) 55.819,51.953 60.361,51.953 61.239,52.832 61.239,53.913 60.781,54.372 60.781,55.146 61.235,55.6 61.235,57.433 60.736,57.931 60.736,69.148 61.006,69.418 61.006,70.231 61.62,70.845 DISP1.6
  Bottom Layer w0.2: v1(54.61,53.162) 54.61,54.486 55.448,55.324 U12.27
GND: C1.1 C2.2 C3.2 C7.2 C8.2 C10.2 C12.1 C14.1 C16.1 C17.1 C18.1 C19.1 C20.1 C21.1 C22.1 C23.1 C24.1 C25.1 C26.1 C27.1 C28.1 C29.1 C30.1 C31.1 D1.2 D3.1 D6.1 D8.1 D9.2 DISP1.1 DISP1.16 P1.1 P2.1 P3.1 P4.5 P4.6 P5.1 R7.2 R8.1 R16.2 R17.1 R18.2 S1.9 S1.10 S1.11 S1.12 S1.13 S1.14 S1.15 S1.16 S2.1 S2.2 S3.1 S3.2 U1.3 U1.5 U1.6 U2.2 U2.4 U3.1 U5.3 U6.2 U6.4 U6.7 U6.8 U6.16 U6.19 U6.20 U6.21 U6.22 U6.23 U6.24 U6.25 U6.26 U6.27 U6.28 U6.31 U6.32 U6.33 U6.34 U6.35 U6.36 U6.37 U6.38 U6.39 U6.40 U6.41 U6.43 U6.44 U6.45 U6.46 U8.5 U10.2 U10.4 U11.4 U12.8 U12.23 U12.35 U12.38 U12.47 | length 756.6
  Top Layer w0.2: P3.1 30.607,92.456 ; P5.1 31.572,75.794 31.572,79.553 30.404,80.721 30.404,92.253 30.607,92.456 ; P1.1 29.743,107.696 ; C1.1 40.789,107.29 ; S1.16 45.774,91.923 46.203,91.923 S1.15 46.203,91.059 S1.14@47.473,91.059 ; S1.14 S1.14@47.473,91.059 ; S1.13 S1.13@48.743,91.059 ; S1.12 S1.12@50.013,91.059 ; U1.6 50.8,112.725 ; S1.9 52.988,90.246 52.553,90.246 S1.10 S1.11 ; U1.5 54.2,112.576 ; C30.1 57.375,101.422 52.4,101.422 51.41,102.413 ; D3.1 57.577,117.194 54.2,113.817 54.2,112.576 ; v1(64.211,85.039) 65.761,86.589 S2.2@68.011,86.589 ; S2.1 S2.2 ; C23.1 71.606,82.993 S2.2@68.011,86.589 ; U3.1 74.016,105.664 75.286,104.394 C3.2 84.546,104.394 85.715,103.226 S3.1 S3.2 85.715,83.094 87.02,81.788 DISP1.16 ; D9.2 72.216,86.788 72.06,86.944 S2.2 ; P2.1 120.904,106.858 120.904,92.202 P4.5 ; 29.743,107.696 28.524,108.915 28.524,116.84 28.727,117.043 37.694,117.043 38.278,116.459 C2.2 38.278,111.401 40.789,108.89 40.789,107.29 ; 29.743,107.696 29.261,107.696 28.393,106.829 D1.2 28.393,93.323 29.261,92.456 30.607,92.456 ; 40.789,107.29 41.347,107.848 50.394,107.848 51.41,106.832 ; S1.14@47.473,91.059 S1.13@48.743,91.059 ; S1.13@48.743,91.059 S1.12@50.013,91.059 ; S1.12@50.013,91.059 51.283,91.059 S1.11 ; 50.8,112.725 51.206,113.132 53.645,113.132 54.2,112.576 ; 50.8,112.725 U1.3 50.8,108.052 51.41,107.442 51.41,106.832 ; S1.11 51.283,94.767 51.41,94.894 U2.4 51.41,102.413 ; 51.41,102.413 U2.2 51.41,106.832 ; S2.2@68.011,86.589 S2.2
  Bottom Layer w0.2: P3.1 34.976,92.456 40.488,97.968 43.078,97.968 43.489,97.558 R7.2 43.489,91.081 44.446,90.123 R8.1 R8.1@46.181,90.123 ; P5.1 38.202,75.794 39.214,74.781 R16.2 39.214,65.557 39.519,65.557 40.484,64.592 ; R18.2 32.639,47.048 39.167,53.576 39.167,60.35 39.395,60.579 42.266,60.579 43.256,61.57 R17.1 ; D8.1 R17.1 ; DISP1.1 48.92,80.264 46.25,82.935 D6.1 46.965,84.023 48.133,82.855 49.657,82.855 50.114,83.312 50.114,91.11 49.581,91.643 ; C25.1 58.522,49.134 ; C22.1 59.813,86.385 64.182,86.385 C24.1 ; U12.35 57.233,59.324 C26.1 49.196,67.361 46.33,67.361 45.491,66.523 45.491,65.024 45.06,64.592 40.484,64.592 ; U12.23 60.361,50.974 58.522,49.134 ; v1(64.211,85.039) 65.604,86.432 C24.1 ; U12.47 64.861,62.568 65.807,63.513 65.807,64.059 ; C27.1 66.559,64.265 66.352,64.059 65.807,64.059 ; C28.1 74.117,55.438 C29.1@72.339,57.216 ; C31.1 89.052,58.696 89.742,59.385 94.234,59.385 95.326,58.293 95.326,56.185 94.437,55.296 93.65,55.296 ; C7.2 91.465,48.26 91.719,48.514 C8.2 93.849,50.093 93.218,50.724 93.218,54.102 ; U10.4 92.306,55.954 93.218,55.042 93.218,54.864 ; U10.2@93.65,57.586 93.65,55.296 ; U5.3 94.666,87.782 95.535,86.914 ; C16.1@101.026,62.677 101.454,62.677 101.879,62.251 U6.7 U6.8 106.921,62.751 107.239,62.433 107.239,61.011 106.979,60.751 U6.4 104.851,60.751 104.801,60.701 103.932,60.701 103.515,60.284 103.515,59.801 104.801,59.801 104.851,59.751 U6.2 107,59.751 108.003,58.748 U6.46 U6.45 U6.45@108.503,57.785 ; 107.032,53.086 105.384,53.086 103.889,54.581 93.697,54.581 93.218,54.102 ; U6.16 108.503,67 108.509,67.005 108.509,67.437 108.814,67.742 109.677,67.742 110.007,67.412 110.007,66.929 110.003,66.933 U6.19 U6.20 U6.21 U6.21@111.003,66.192 ; U6.44 U6.44@109.003,57.785 ; U6.43 109.503,57.785 U6.44@109.003,57.785 ; U6.41 110.503,57.785 U6.40@111.003,57.785 ; U6.40 U6.40@111.003,57.785 ; U6.22 U6.22@111.503,66.192 ; U6.23 U6.23@112.003,66.192 ; U6.34 U6.34@113.944,60.251 ; U6.31 U6.31@113.944,61.751 ; U6.28 113.944,63.251 U6.27@113.944,63.751 ; U6.27 U6.27@113.944,63.751 ; U6.26 U6.26@113.944,64.251 ; U6.25 U6.25@113.944,64.751 ; P4.5 P4.6 114.275,88.113 ; 40.484,64.592 42.113,62.963 42.113,62.259 R17.1 ; R8.1@46.181,90.123 47.701,91.643 48.459,91.643 ; R8.1@46.181,90.123 46.939,90.123 48.459,91.643 ; 48.459,91.643 49.581,91.643 ; 49.581,91.643 64.211,91.643 65.604,90.25 65.604,88.798 ; 58.522,49.134 64.595,49.134 67.4,46.33 100.275,46.33 C17.1@108.568,54.623 ; C24.1 65.604,88.798 ; 65.604,88.798 68.627,91.821 76.81,91.821 77.245,91.385 C21.1 79.045,90.449 79.096,90.5 C20.1 80.895,91.44 81.454,91.999 87.401,91.999 90.221,89.179 92.481,89.179 94.747,86.914 95.535,86.914 ; 65.807,64.059 65.807,65.43 64.846,66.391 60.992,66.391 60.361,65.759 U12.38 60.361,58.306 62.057,56.61 62.057,56.306 62.605,55.758 63.379,55.758 63.945,56.324 U12.8 66.711,56.374 67.597,56.374 67.647,56.424 68.395,56.424 68.495,56.324 69.044,56.324 69.614,56.893 70.906,56.893 71.229,57.216 C29.1 C29.1@72.339,57.216 ; C29.1@72.339,57.216 77.668,57.216 87.02,66.568 DISP1.16 89.459,76.505 94.234,81.28 102.155,81.28 102.968,82.093 C14.1 102.968,85.039 102.362,85.645 U11.4 ; 93.218,54.102 93.218,54.864 ; 93.218,54.864 93.65,55.296 ; 95.535,86.914 U11.4 ; U11.4 102.362,87.655 102.819,88.113 114.275,88.113 ; U6.45@108.503,57.785 108.503,56.185 108.53,56.158 108.53,54.661 C17.1@108.568,54.623 ; U6.45@108.503,57.785 U6.44@109.003,57.785 ; C17.1@108.568,54.623 110.207,52.984 117.348,52.984 119.634,55.27 C12.1 118.897,60.194 118.894,60.198 116.383,60.198 C18.1 116.34,59.889 115.478,60.751 U6.33 ; U6.40@111.003,57.785 111.503,57.785 U6.39 U6.38 112.003,57.785 112.503,57.785 U6.37 112.503,58.776 112.979,59.251 U6.36 U6.35 113.944,59.751 U6.34@113.944,60.251 ; U6.21@111.003,66.192 U6.22@111.503,66.192 ; U6.21@111.003,66.192 111.003,62.763 112.015,61.751 U6.31@113.944,61.751 ; U6.22@111.503,66.192 U6.23@112.003,66.192 ; U6.23@112.003,66.192 U6.24@112.503,66.192 ; U6.24@112.503,66.192 U6.24 112.503,67.513 112.78,67.79 112.78,69.113 113.335,69.113 113.335,83.189 113.313,83.21 C10.2 113.313,84.861 113.894,85.442 U8.5 113.894,87.732 114.275,88.113 ; U6.24@112.503,66.192 112.503,65.227 112.979,64.751 U6.25@113.944,64.751 ; U6.34@113.944,60.251 113.944,60.751 U6.33 ; U6.31@113.944,61.751 113.944,61.251 U6.32 U6.33 ; U6.27@113.944,63.751 U6.26@113.944,64.251 ; U6.26@113.944,64.251 U6.25@113.944,64.751
GND_ISO: C4.1 C5.1 C6.1 C9.1 C11.2 C13.1 C15.1 J1.5 U3.4 U4.2 U5.5 U8.4 U9.2 U9.5 U11.5 | length 139.1
  Top Layer w0.2: U3.4 81.636,109.165 84.938,105.863 C4.1 90.021,105.863 91.034,104.851 93.37,104.851 93.777,105.258 93.777,106.528 93.472,106.832 ; U4.2 93.472,106.832 ; v1(103.226,111.15) 99.216,111.15 C6.1 ; J1.5 103.938,111.1 C6.1 ; 93.472,106.832 96.469,106.832 97.972,108.335 C5.1 98.958,109.576 99.216,109.833 C6.1
  Bottom Layer w0.2: U5.5 93.396,110.592 93.875,111.07 C9.1 95.145,111.379 101.752,111.379 ; U11.5 102.362,93.802 102.942,94.383 C15.1 102.942,96.618 103.226,96.901 111.865,96.901 ; v1(103.226,111.15) 106.718,111.15 U9.5 102.807,112.434 101.752,111.379 ; U8.4 113.894,93.701 113.212,94.383 C11.2 ; C13.1 112.366,111.147 110.541,109.322 U9.2@110.541,108.077 ; 101.752,111.379 100.508,110.134 95.529,110.134 95.326,109.931 95.326,108.102 96.088,108.102 96.799,107.391 105.004,107.391 106.996,109.384 109.234,109.384 U9.2@110.541,108.077 ; U9.2@110.541,108.077 U9.2 110.541,98.226 111.865,96.901 ; 111.865,96.901 C11.2 ; 111.865,96.901 112.979,96.901 113.212,96.669 C11.2
INT: U6.17 U12.10 | length 68.9
  Top Layer w0.2: v1(70.147,53.391) 72.713,50.825 101.143,50.825 103.429,53.111 103.429,57.658 98.501,62.586 98.501,65.837 99.797,67.132 105.918,67.132 109.003,64.047 108.966,64.009 v1(108.966,64.008)
  Bottom Layer w0.2: U12.10 68.214,55.324 v1(70.147,53.391) ; v1(108.966,64.008) 108.966,66.164 U6.17
LED: R12.2 U12.39 | length 58
  Top Layer w0.2: v1(61.671,58.318) 61.671,56.847 61.798,56.72 62.057,56.461 62.057,56.306 62.605,55.758 63.379,55.758 63.554,55.932 72.341,55.932 75.794,59.385 75.794,78.892 77.445,80.543 77.445,94.285 76.907,94.822 R12.2
  Bottom Layer w0.2: U12.39 60.861,59.256 61.671,58.445 v1(61.671,58.318)
MISO: U6.47 U12.16 | length 62.9
  Top Layer w0.2: v1(81.991,48.565) 102.819,48.565 105.054,50.8 v1(105.054,55.448)
  Bottom Layer w0.2: U12.16 63.861,51.734 64.311,51.285 68.324,51.285 69.571,50.038 69.571,49.581 69.82,49.332 72.014,49.332 77.978,55.296 81.94,55.296 82.22,55.016 82.22,48.793 v1(81.991,48.565) ; v1(105.054,55.448) 106.477,55.448 107.503,56.475 U6.47
MOSI: U6.1 U12.17 | length 84.1
  Top Layer w0.2: v1(85.293,61.493) 85.293,64.059 83.947,65.405 83.947,69.596 85.369,71.018 86.944,71.018 v1(97.714,60.249)
  Bottom Layer w0.2: U12.17 63.361,51.555 64.032,50.885 68.111,50.885 68.936,50.06 68.936,49.408 69.412,48.932 74.23,48.932 80.162,54.864 81.553,54.864 81.809,54.608 81.809,53.238 80.467,51.897 80.467,48.133 81.28,47.32 82.093,47.32 82.931,48.158 82.931,59.131 v1(85.293,61.493) ; v1@97.765,60.223 98.737,59.251 U6.1
NetC2_1: C2.1 D2.2 U1.1 | length 26.6
  Top Layer w0.2: D2.2 36.668,119.803 38.278,121.412 ; C2.1 38.278,121.412 ; U1.1 47.4,110.896 46.584,110.896 38.278,119.202 38.278,121.412
NetC4_2: C4.2 U3.5 U4.1 U4.3 | length 26.9
  Top Layer w0.2: U3.5 81.636,118.059 86.97,112.725 86.97,109.376 87.782,108.563 C4.2 90.449,108.563 91.23,107.782 U4.1 ; 91.288,107.747 90.907,107.366 90.907,106.274 91.298,105.882 U4.3
NetC5_2: C5.2 U4.4 | length 3.8
  Top Layer w0.2: U4.4 97.003,105.882 97.25,105.635 C5.2
NetC7_1: C7.1 U10.1 Y1.2 | length 17.6
  Bottom Layer w0.2: C7.1 86.636,50.495 86.874,50.734 Y1.2 87.147,52.97 89.713,55.535 89.713,57.836 90.754,58.877 93.751,58.877 94.256,58.372 U10.1@94.256,56.992
NetC8_1: C8.1 U10.8 Y1.1 | length 42.8
  Bottom Layer w0.2: U10.8 94.256,60.379 93.796,59.919 84.734,59.919 83.337,58.522 83.337,49.047 85.623,46.761 96.016,46.761 96.549,47.295 C8.1 96.549,50.648 96.374,50.823 Y1.1
NetD1_1: D1.1 R1.2 | length 13.1
  Top Layer w0.2: D1.1 31.297,98.755 38.354,98.755 40.712,101.114 R1.2
NetD3_2: D3.2 L1.1 U1.2 | length 41.7
  Top Layer w0.2: U1.2 49.1,112.573 48.567,113.106 46.33,113.106 45.263,114.173 45.263,124.841 57.709,124.841 58.852,123.698 58.852,121.158 ; D3.2 58.852,121.158 ; L1.1 60.147,122.453 58.852,121.158
NetD4_2: D4.2 R4.2 | length 2.7
  Top Layer w0.2: D4.2 88.011,119.507 88.062,119.456 R4.2
NetD9_1: D9.1 R12.1 | length 2.7
  Top Layer w0.2: R12.1 76.022,90.932 76.276,90.678 D9.1
NetDISP1_3: DISP1.3 R18.3 | length 38.2
  Top Layer w0.2: R18.3 35.128,52.048 48.133,65.053 v1(48.133,71.984)
  Bottom Layer w0.2: v1(48.133,71.984) 48.133,74.371 48.616,74.854 53.67,74.854 54,75.184 DISP1.3
NetDISP1_15: DISP1.15 R13.2 | length 35.3
  Top Layer w0.2: DISP1.15 84.48,74.524 90.348,68.656 105.207,68.656 106.451,69.901 106.451,73.809 107.29,74.647 R13.2
NetJ3_1: J3.1 P3.2 R6.1 | length 14.1
  Bottom Layer w0.2: P3.2 36.297,87.376 37.592,88.671 R6.1 40.535,90.072 J3.1
NetJ3_2: J3.2 R7.1 | length 3.9
  Bottom Layer w0.2: J3.2 40.538,94.386 40.789,94.637 R7.1
NetJ4_1: J4.1 P5.2 R11.1 | length 45.6
  Top Layer w0.2: P5.2 30.658,70.714 30.455,70.51 30.455,64.77 30.886,64.338 35.408,64.338 37.795,66.726 J4.1
  Bottom Layer w0.2: P5.2 39.649,63.094 39.649,62.31 R11.1
NetJ4_2: J4.2 R16.1 | length 18.9
  Bottom Layer w0.2: J4.2 40.335,71.204 41.914,69.625 R16.1
NetP4_3: P4.3 R14.2 | length 14.8
  Top Layer w0.2: R14.2 112.145,86.153 112.979,85.319 121.133,85.319 121.344,85.53 121.344,88.002 P4.3
NetP4_4: P4.4 R15.1 | length 7
  Top Layer w0.2: R15.1 112.094,89.76 112.801,89.052 P4.4
NetR2_1: R2.1 U5.6 U7.1 U7.2 | length 23.5
  Top Layer w0.2: U7.2 U7.1
  Bottom Layer w0.2: U7.1 92.253,98.425 92.786,98.958 92.786,104.267 94.666,106.147 94.666,107.755 ; U5.6 94.666,107.755 ; R2.1 96.735,105.686 94.666,107.755
NetR3_2: R3.2 U5.2 | length 39
  Top Layer w0.2: v1(95.656,101.879) 95.656,78.511 v1(103.886,70.282)
  Bottom Layer w0.2: v1(95.656,101.879) 95.936,102.159 U5.2 ; R3.2 102.612,70.565 102.895,70.282 v1(103.886,70.282)
NetU7_3: U7.3 U9.3 | length 31.6
  Bottom Layer w0.2: U7.3 93.32,93.345 94.005,94.031 94.005,104.038 94.59,104.623 102.954,104.623 107.315,108.984 108.669,108.984 109.271,108.382 U9.3
NetU8_2: U8.2 U9.1 | length 21.2
  Bottom Layer w0.2: U8.2 111.354,91.816 111.557,91.612 114.503,91.612 114.503,98.679 111.811,101.371 U9.1
NetU9_4: U9.4 U11.6 | length 21.7
  Bottom Layer w0.2: U11.6 103.632,91.872 103.2,91.44 102.159,91.44 101.752,91.846 101.752,101.194 107.645,107.086 108.001,107.086 U9.4
NRST: C23.2 R9.2 S2.3 S2.4 U12.7 | length 53.4
  Top Layer w0.2: R9.2 R9.2@61.777,82.229 ; S2.3 S2.4 63.551,86.118 63.279,86.118 63.279,85.17 61.777,83.668 R9.2@61.777,82.229 ; v1(72.923,59.995) 70.714,62.205 70.714,78.664 68.906,80.471 C23.2 65.38,82.271 65.338,82.229 R9.2@61.777,82.229
  Bottom Layer w0.2: U12.7 68.783,56.824 69.302,57.343 70.271,57.343 v1(72.923,59.995)
OSC32_IN: C21.2 U12.3 Y2.1 | length 40
  Top Layer w0.2: v1(68.961,59.461) 69.367,59.055 73.584,59.055 73.863,59.334 73.863,62.027 73.152,62.738 v1(73.152,80.721)
  Bottom Layer w0.2: U12.3 68.323,58.824 v1(68.961,59.461) ; v1(73.152,80.721) 74.803,82.372 Y2.1 74.803,87.503 74.545,87.761 C21.2
OSC32_OUT: C20.2 U12.4 Y2.2 | length 42.9
  Top Layer w0.2: v1(74.727,66.192) 75.387,66.853 v1(75.387,80.924)
  Bottom Layer w0.2: U12.4 69.494,58.324 70.002,58.832 70.002,61.468 v1(74.727,66.192) ; v1(75.387,80.924) 78.866,80.924 Y2.2 82.803,87.274 83.595,88.067 C20.2
OSC_IN: C24.2 R10.1 U12.5 Y3.1 | length 58.1
  Bottom Layer w0.2: U12.5 69.736,57.824 70.434,58.522 70.434,60.147 71.399,61.112 74.574,61.112 80.467,67.005 80.467,77.673 80.061,78.08 65.942,78.08 64.063,79.959 R10.1 64.063,82.514 65.024,83.475 Y3.1 68.304,83.475 C24.2
OSC_OUT: C22.2 R10.2 U12.6 Y3.2 | length 47.1
  Top Layer w0.2: v1(63.525,78.562) 63.094,78.13 63.094,73.604 62.794,73.304 62.794,70.922 63.779,69.936 63.779,65.024 62.911,64.156 62.911,59.255 62.616,58.96 62.616,58.185 63.164,57.637 64.165,57.637 v1(64.479,57.324)
  Bottom Layer w0.2: C22.2 61.243,88.693 60.173,89.764 58.522,89.764 57.683,88.925 57.683,83.475 Y3.2 61.363,83.475 R10.2 61.363,79.303 62.103,78.562 v1(63.525,78.562) ; v1(64.479,57.324) U12.6
RESET_VPC3: U6.12 U12.11 | length 70.1
  Top Layer w0.2: v1(70.099,51.841) 70.706,51.841 75.024,47.523 104.038,47.523 107.112,50.597 107.112,55.499 98.908,63.703 98.908,65.024 99.492,65.608 v1(104.369,65.608)
  Bottom Layer w0.2: U12.11 67.666,54.824 69.109,53.381 69.109,52.832 v1(70.099,51.841) ; v1(104.369,65.608) 105.225,64.751 U6.12
RS: DISP1.4 U12.25 | length 28
  Top Layer w0.2: v1(56.48,52.943) 55.478,53.945 55.478,58.318 57.247,60.087 57.247,72.796 56.54,73.503 DISP1.4
  Bottom Layer w0.2: v1(56.48,52.943) 56.896,52.943 57.761,53.808 57.761,54.324 U12.25
RTS: R3.1 U6.14 | length 6.3
  Bottom Layer w0.2: R3.1 105.312,70.289 107.503,68.097 U6.14
RW: DISP1.5 U12.26 | length 25.4
  Top Layer w0.2: v1(56.82,54.381) 59.579,57.14 59.579,69.19 59.08,69.688 DISP1.5
  Bottom Layer w0.2: v1(56.82,54.381) 57.262,54.824 U12.26
RXD: U6.15 U8.6 | length 24.2
  Bottom Layer w0.2: U6.15 108.003,67.871 108.306,68.174 111.1,68.174 111.43,68.504 111.43,70.129 112.319,71.018 112.319,86.208 112.624,86.512 U8.6
SPI_CLK: U6.48 U12.15 | length 48.5
  Top Layer w0.2: v1(64.364,54.712) 65.184,55.532 76.372,55.532 79.783,52.121 97.739,52.121 v1(101.323,55.704)
  Bottom Layer w0.2: U12.15 64.361,54.709 v1(64.364,54.712) ; v1(101.323,55.704) 103.353,57.734 107.003,57.734 U6.48
STATUS: R4.1 U6.11 | length 110.4
  Top Layer w0.2: R4.1 94.052,115.465 96.749,118.161 96.749,121.92 97.561,122.733 100.737,122.733 101.244,123.24 103.48,123.24 103.784,122.936 103.784,121.514 104.369,120.929 112.166,120.929 113.259,119.837 113.259,116.078 110.795,113.614 110.795,86.436 112.319,84.912 112.319,65.557 109.938,63.177 109.938,62.261 109.391,61.713 108.616,61.713 106.598,63.731 100.708,63.731 v1(99.847,64.592)
  Bottom Layer w0.2: v1(99.847,64.592) 103.723,64.592 104.064,64.251 U6.11
SW: C30.2 S3.3 S3.4 U12.19 | length 90.4
  Top Layer w0.2: C30.2 60.075,100.99 65.964,100.99 69.647,97.307 81.255,97.307 S3.3 S3.4 81.255,81.763 80.874,81.382 v1(80.874,53.746)
  Bottom Layer w0.2: U12.19 62.361,51.53 63.407,50.485 67.799,50.485 67.842,50.441 67.842,49.648 68.959,48.532 75.659,48.532 v1(80.874,53.746)
SWCLK: P2.2 U12.37 | length 177.7
  Top Layer w0.2: v1(56.312,66.497) v1(56.312,69.85)
  Bottom Layer w0.2: v1(56.312,66.497) 59.861,62.948 U12.37 ; v1(56.312,69.85) 48.057,69.85 47.193,70.714 47.193,74.168 47.346,74.32 47.346,77.902 44.399,80.848 44.399,85.141 43.79,85.75 30.81,85.75 30.404,86.157 30.404,97.993 30.886,98.476 77.241,98.476 96.749,117.983 96.749,122.809 97.18,123.241 112.116,123.241 117.59,117.766 117.59,107.632 P2.2
SWDIO: P2.3 U12.34 | length 141.8
  Bottom Layer w0.2: U12.34 52.857,58.824 51.46,57.427 51.46,48.082 53.645,45.898 115.214,45.898 121.382,52.065 121.382,101.3 P2.3
TXD: R5.1 U6.13 U11.2 | length 40.7
  Top Layer w0.2: v1(104.343,85.242) 107.95,85.242 111.912,81.28 111.912,73.152 111.1,72.339 v1(107.391,72.339)
  Bottom Layer w0.2: v1(104.343,85.242) 104.902,85.801 U11.2 ; U6.13 107.003,66.969 103.596,66.969 103.102,67.462 R5.1 103.102,69.037 101.752,70.387 101.752,72.644 102.006,72.898 106.832,72.898 v1(107.391,72.339)
VCC_ISO: C6.2 C9.2 C11.1 C13.2 C15.2 J1.6 R2.2 U4.5 U5.7 U5.8 U8.1 U9.8 U11.8 | length 112.3
  Top Layer w0.9: U4.5@95.629,108.104 96.516,108.992 C6.2 96.516,115.439 98.45,117.373 98.45,121.437 98.628,121.615 101.918,121.615 J1.6
  Bottom Layer w0.2: U5.7 U5.8 ; C9.2 C9.2@96.575,112.954 ; 101.173,109.042 R2.2 ; 101.306,117.17 102.398,118.262 J1.6 ; C15.2 105.642,94.357 106.172,93.828 U11.8 108.077,92.614 108.153,92.537 U8.1 ; 105.838,110.084 107.34,110.084 ; 107.747,114.3 108.61,113.436 108.61,111.354 107.34,110.084 ; C11.1 110.512,94.256 110.084,93.828 U8.1 ; 116.84,93.32 114.733,91.212 110.718,91.212 110.084,91.846 U8.1 ; 116.84,112.928 115.922,113.847 C13.2 112.272,113.847 111.811,113.386 U9.8 111.811,111.354 110.541,110.084 107.34,110.084
  Bottom Layer w0.9: U5.8 101.173,109.042 ; 101.306,117.17 99.815,115.679 97.536,115.679 96.575,114.718 96.575,112.954 98.704,112.954 100.051,114.3 107.747,114.3 ; R2.2 104.14,108.386 105.838,110.084 ; 116.84,93.32 116.84,112.928
pads on no net: DISP1.7 DISP1.8 DISP1.9 DISP1.10 DISP1.19 J1.1 J1.2 J1.4 J1.7 J1.9 J1.10 J1.11 U3.8 U5.1 U5.4 U7.4 U7.5 U7.6 U7.7 U7.8 U7.9 U7.10 U7.11 U7.12 U7.13 U7.14 U8.3 U8.7 U10.3 U11.3 U11.7 U12.2 U12.18 U12.28 U12.29
copper on no net: | length 0.1
  Top Layer w0.2: 25.933,41.758 26.06,41.758

## Polygon pours and split planes (outlines as drawn)
GND on Top Layer "Top Layer-No Net" (solid, pour order 7): 26.01,127.33 122.276,127.33 122.707,126.898 122.707,41.681 26.34,41.681 26.187,41.834
GND on Bottom Layer "Top Layer-No Net" (solid, pour order 9): 122.911,127.152 122.809,127.051 25.984,127.051 25.984,41.732 26.187,41.529 26.289,41.631 123.012,41.631

## Keep-outs
Keep-Out Layer:
  the board outline again, w0.2

## Silkscreen, mask and mechanical layers (free items; w line width, h text height)
Top Overlay:
  text "+" at 40.488,125.73 h0.54 r270
  text "DATA" at 86.868,125.146 h0.54
  text "-" at 40.081,112.166 h0.54 r270
  text "-" at 26.543,108.382 h0.54 r270
  text "GND" at 122.25,107.696 h0.54 r90
  text "+" at 68.25,106.705 h0.54 r270
  text "PWR IN" at 26.441,106.35 h0.54 r270
  text "-" at 81.229,105.893 h0.54
  text "CLK" at 122.326,105.054 h0.54 r90
  text "SWD" at 117.754,102.489 h1 r90
  text "+" at 26.543,101.854 h0.54 r270
  text "SWDIO" at 122.326,101.676 h0.54 r90
  text "3V3" at 122.25,99.212 h0.54 r90
  text "PWR LED" at 32.614,97.612 h0.54
  text "GND" at 26.34,93.955 h0.54 r270
  text "GND" at 119.126,93.447 h0.54 r90
  text "BOOT0" at 122.326,88.011 h0.54 r90
  text "BOOT1" at 115.926,87.833 h0.54 r90
  text "IN" at 26.391,87.528 h0.54 r270
  text "RESET" at 64.516,84.811 h0.54
  text "USER BUTTON" at 80.34,84.785 h0.54
  text "3V3" at 119.278,83.134 h0.54 r90
  text "24V" at 26.34,82.118 h0.54 r270
  text "SLAVE ADDRESS" at 44.425,81.864 h0.54
  text "JUMPER ON = 4-20mA / JUMPER OFF = 0-10V" at 37.262,81.813 h0.54 r270
  text "GND" at 26.34,76.81 h0.54 r270
  text "IN" at 26.543,71.222 h0.54 r270
  text "24V" at 26.416,66.015 h0.54 r270
Bottom Overlay:
  drawing of 646 lines, arcs and shapes, not listed
  text "PROFIBUS DP SLAVE PROTOTYPE BOARD" at 85.776,121.437 h1.52

## Text inside footprints (layer, text, board x,y; h text height)
D2: Top Overlay "A" at 27.711,115.595 h0.52 r1.17; Top Overlay "C" at 27.635,119.405 h0.52 r359.76
J1: Top Overlay "1" at 100.763,115.8 h1.5; Top Overlay "5" at 111.593,115.8 h1.5; Top Overlay "9" at 110.208,125.2 h1.5; Top Overlay "6" at 101.898,125.2 h1.5